# Altium PCB PCB3.PcbDoc
Units mm, origin at the board's own origin, x right, y up, seen from the top; angles counter-clockwise.
Board outline 60 x 50 mm, 2 copper layers (Top Layer, Bottom Layer); 63 components, 61 nets, 255 pads, 234 vias.
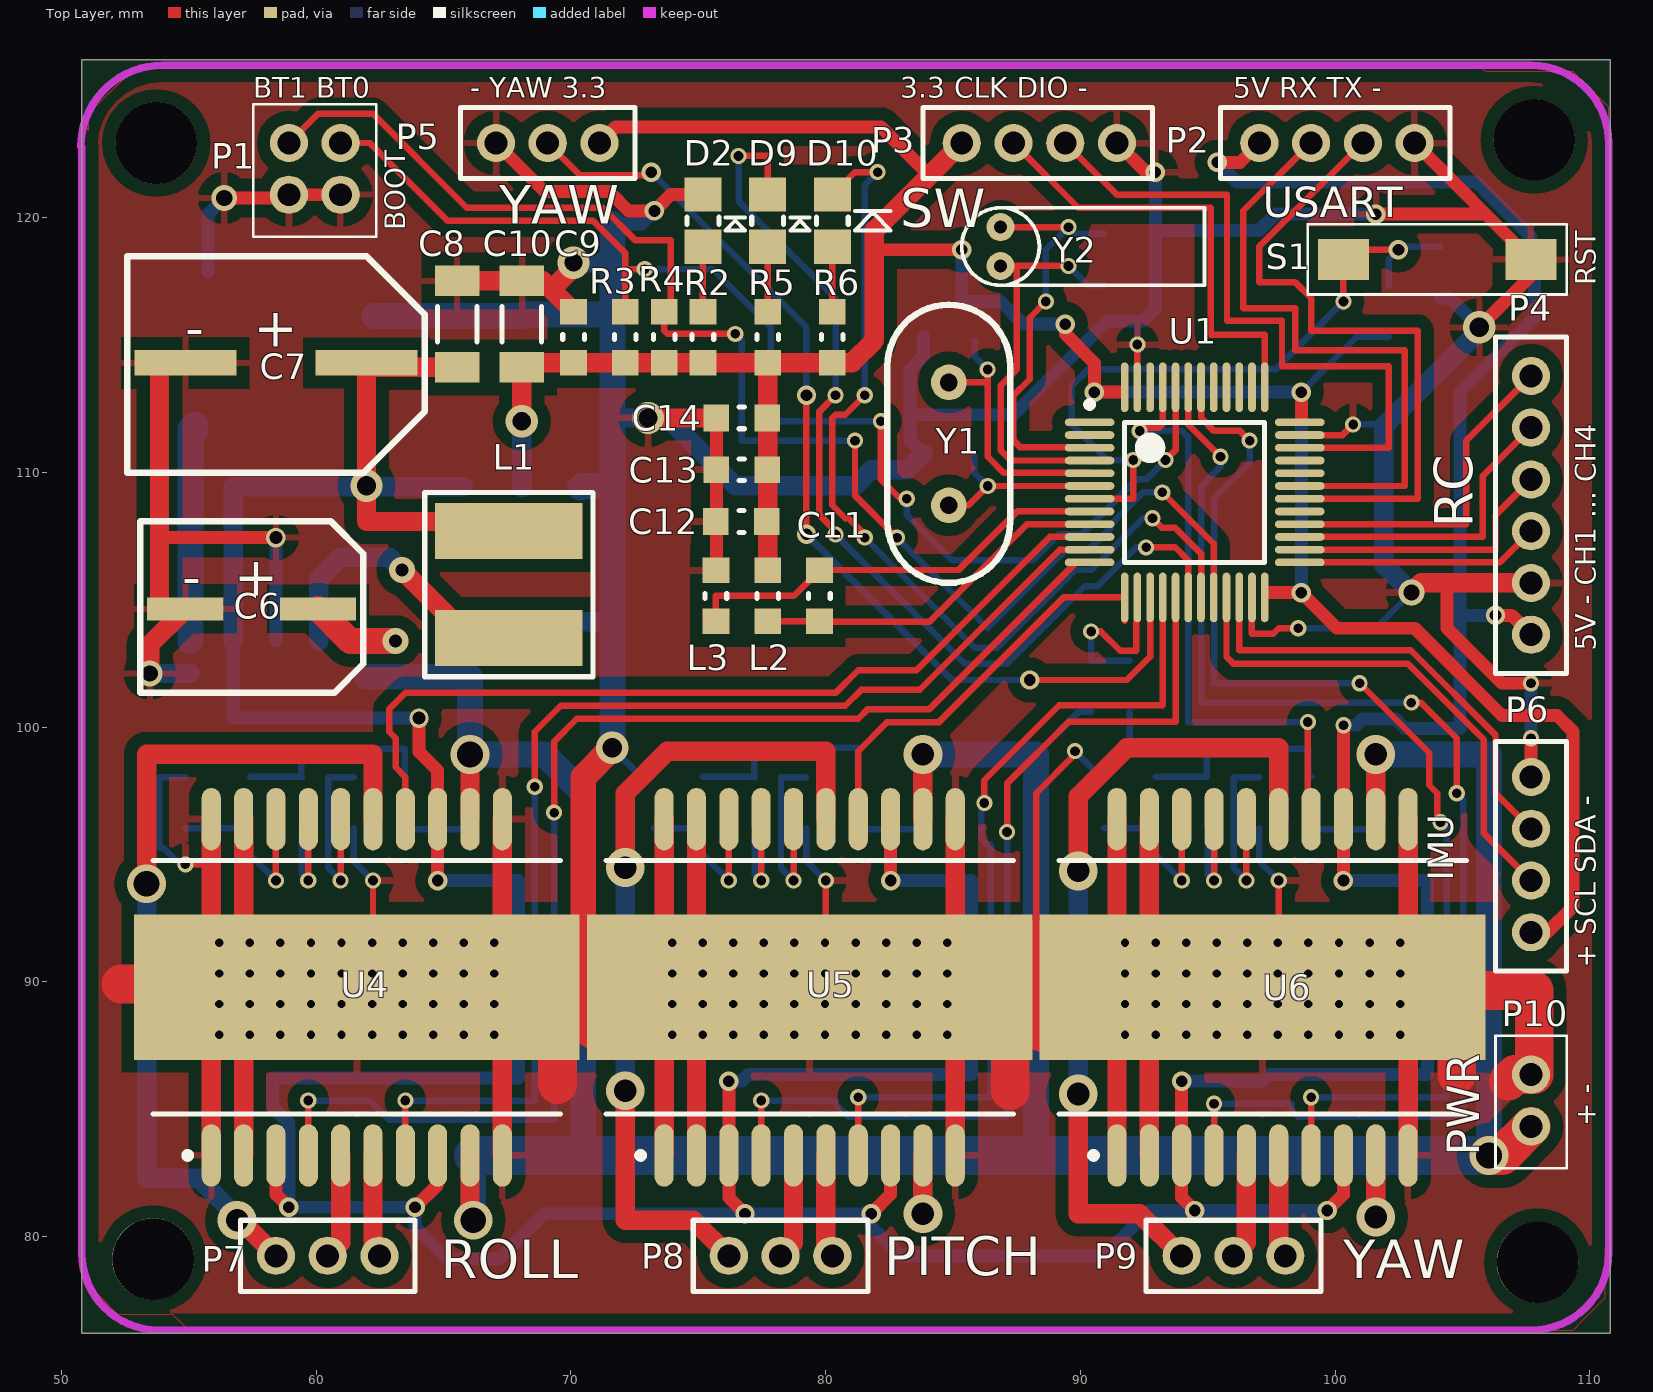
[diagram p0: Top Layer view]
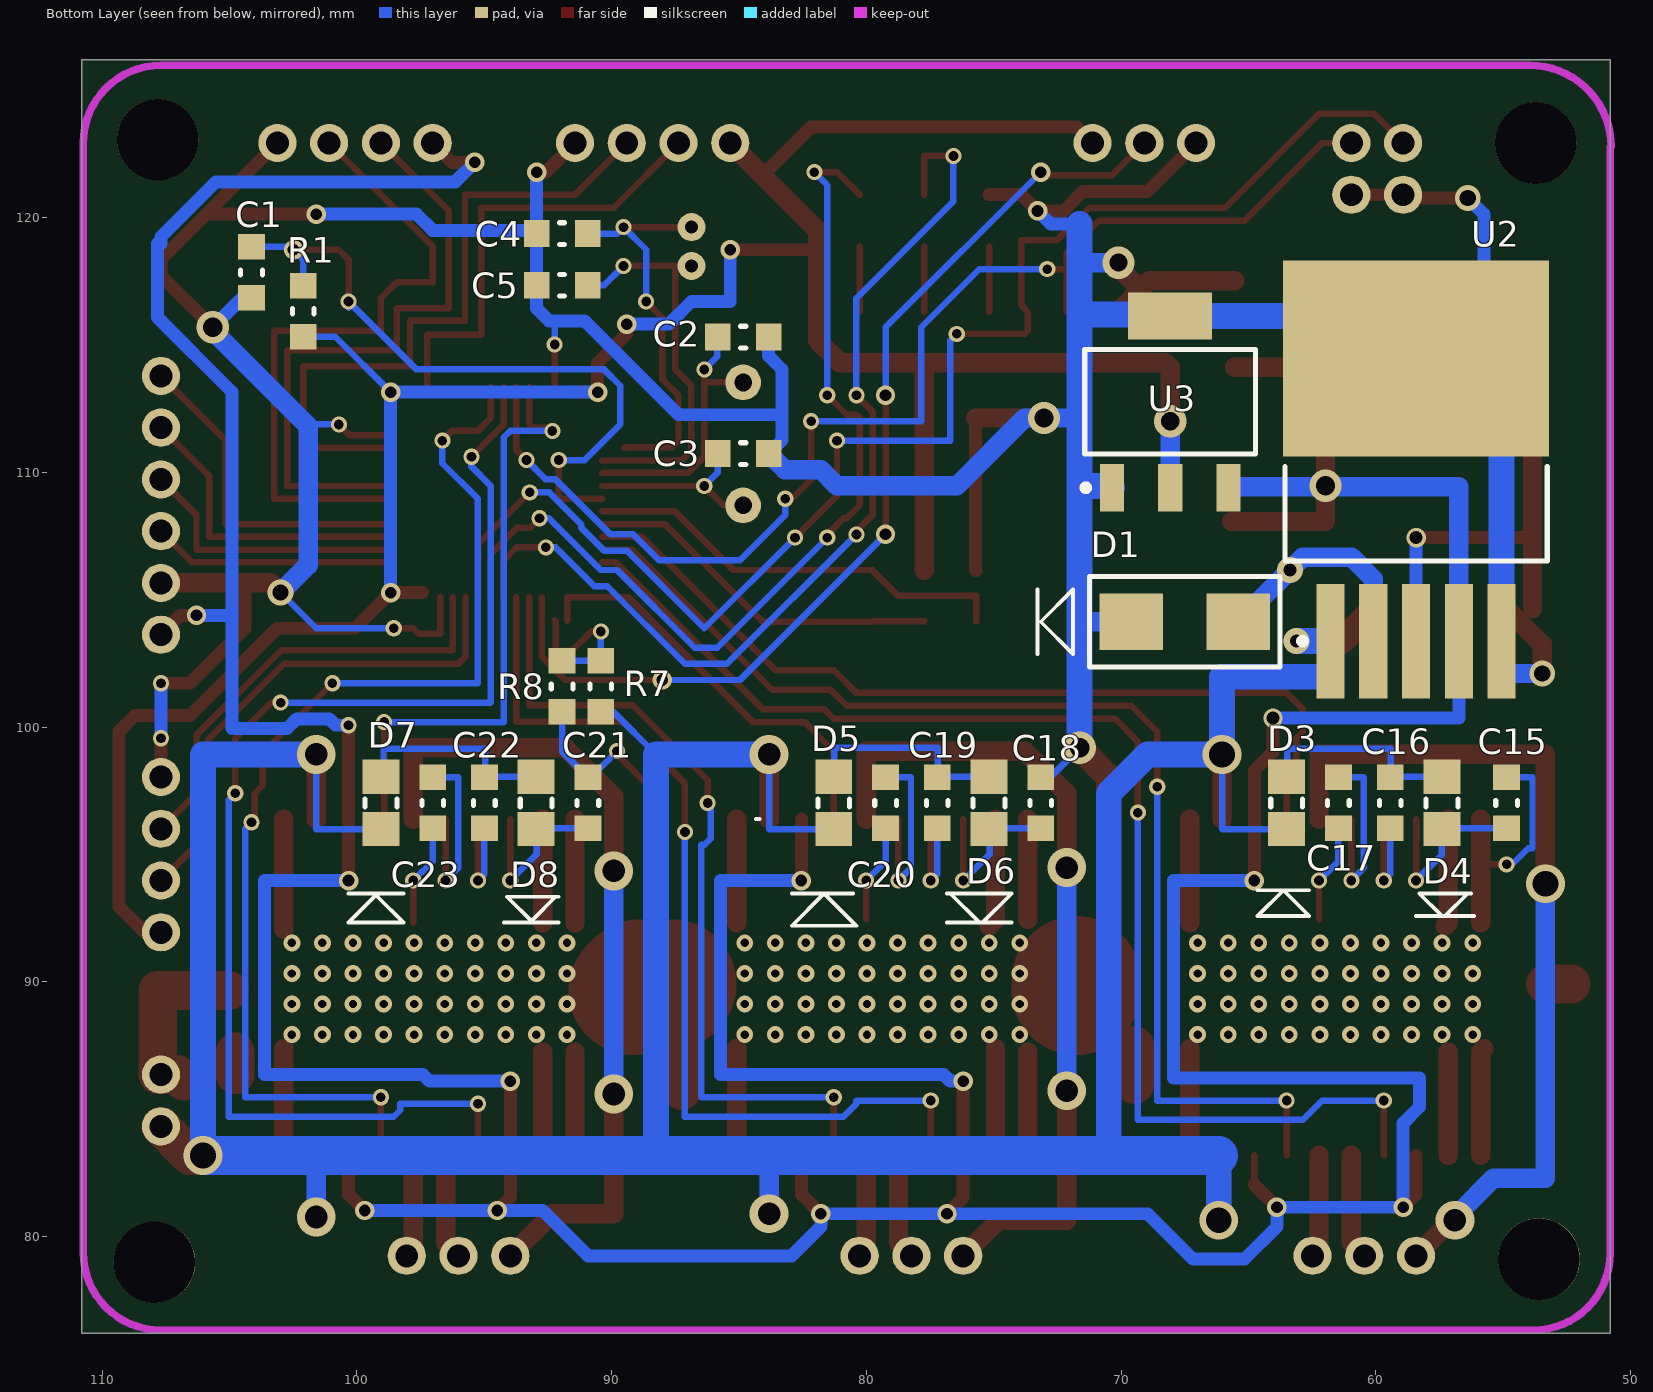
[diagram p1: Bottom Layer view, seen from below]

## Layer stack, top to bottom
Top Solder: solder mask 0.0102, Solder Resist, Dk 3.5
Top Layer: signal copper 0.0356
Dielectric1: dielectric 0.32, FR-4, Dk 4.8
Bottom Layer: signal copper 0.0356
Bottom Solder: solder mask 0.0102, Solder Resist, Dk 3.5

## Board outline
50.8,76.2 110.8,76.2 110.8,126.2 50.8,126.2

## Design rules (kind name [scope] priority, off if disabled: settings)
Clearance [All] p1: gap=0.178 ignorepadtopadclearanceinfootprint=FALSE except(0: Arc-Hole Track-Hole SMDPad-Hole THPad-Hole Via-Hole Fill-Hole Poly-Hole Region-Hole Text-Hole)
FabricationTestPointUsage TestPointUsage [All] p1: valid=0 allowmultiple=FALSE
FabricationTestpoint Testpoint [All] p1: side=3 testpointundercomponent=TRUE minsize=1.016 maxsize=2.54 preferedsize=1.524 minholesize=0 maxholesize=1.016 preferedholesize=0.813 testpointgrid=0.025 allowsidetop=TRUE allowsidebottom=TRUE usegrid=TRUE gridtolerance=0
HoleSize [All] p1: absolutevalues=TRUE maxlimit=25.4 minlimit=0.305 maxpercent=80.000 minpercent=20.000
PolygonConnect [All] p1: connectstyle=Relief reliefconductorwidth=0.254 reliefentries=4 polygonreliefangle="90 Angle" airgapwidth=0.254
RoutingVias [All] p1: holewidth=0.3 width=0.5 viastyle="Through Hole" minholewidth=0.711 minwidth=1.27 maxholewidth=0.711 maxwidth=1.27
SolderMaskExpansion [All] p1: expansion=0.102
Width [All] p1: maxlimit=25.4 minlimit=0.1 preferedwidth=0.2 minimp=50.000000 maximp=50.000000 favimp=50.000000
27 further rules are at their usual default settings.

## Components (designator, comment, footprint, x,y, rotation, side; value= is the part's Value field where it differs from the comment)
C1 "Cap" 0603 104.14,117.856 r90 bottom
C2 "Cap" 0603 84.836,115.316 r0 bottom
C3 "Cap" 0603 84.836,110.744 r180 bottom
C4 "Cap" 0603 91.948,119.38 r180 bottom
C5 "Cap" 0603 91.948,117.348 r0 bottom
C6 "Cap Pol1" "25V 100uF 6*7" 57.404,104.648 r270 top
C7 "Cap Pol1" "25V 330uF 8*10" 58.42,114.3 r270 top
C8 "Cap Pol1" 1206 65.532,115.824 r90 top
C9 "Cap" 0603 70.104,115.316 r270 top
C10 "Cap Pol1" 1206 68.072,115.824 r90 top
C11 "Cap" 0603 79.756,105.156 r270 top
C12 "Cap" 0603 76.692,108.077 r0 top
C13 "Cap" 0603 76.708,110.109 r0 top
C14 "Cap" 0603 76.708,112.141 r0 top
C15 "Cap" 0603 54.864,97.028 r270 bottom
C16 "Cap" 0603 59.436,97.028 r270 bottom
C17 "Cap" 0603 61.468,97.028 r90 bottom
C18 "Cap" 0603 73.152,97.028 r270 bottom
C19 "Cap" 0603 77.216,97.028 r270 bottom
C20 "Cap" 0603 79.248,97.028 r90 bottom
C21 "Cap" 0603 90.932,97.028 r270 bottom
C22 "Cap" 0603 94.996,97.028 r270 bottom
C23 "Cap" 0603 97.028,97.028 r90 bottom
D1 "Diode 1N4003" SMA 67.564,104.14 r180 bottom
D2 "D2" 0805 75.184,119.888 r90 top
D3 "Diode 1N914" 0805 63.5,97.028 r90 bottom
D4 "Diode 1N914" 0805 57.404,97.028 r270 bottom
D5 "Diode 1N914" 0805 81.28,97.028 r90 bottom
D6 "Diode 1N914" 0805 75.184,97.028 r270 bottom
D7 "Diode 1N914" 0805 99.06,97.028 r90 bottom
D8 "Diode 1N914" 0805 92.964,97.028 r270 bottom
D9 "D2" 0805 77.724,119.888 r90 top
D10 "D2" 0805 80.264,119.888 r90 top
L1 "Inductor" "330uH 5.8*5*4" 67.564,105.664 r180 top
L2 "Inductor" 0603 77.724,105.156 r270 top
L3 "Inductor" 0603 75.692,105.156 r270 top
P1 "BOOT" "2x2P 2mm" 58.928,120.904 r90 top
P2 "USART1" "4P 2mm" 97.028,122.936 r0 top
P3 "SW" "4P 2mm" 85.344,122.936 r0 top
P4 "RC" "6P 2mm" 107.696,103.632 r90 top
P5 "YAW_ANGLE" "3P 2mm" 71.12,122.936 r180 top
P6 "MPU6050" "4P 2mm" 107.696,91.948 r90 top
P7 "Roll" "3P 2mm" 62.484,79.248 r180 top
P8 "Pitch" "3P 2mm" 80.264,79.248 r180 top
P9 "Yaw" "3P 2mm" 98.044,79.248 r180 top
P10 "Power" "2P 2mm" 107.696,84.328 r90 top
R1 "Res2" 0603 102.108,116.332 r90 bottom
R2 "Res2" 0603 75.184,115.316 r270 top
R3 "Res2" 0603 72.136,115.316 r90 top
R4 "Res2" 0603 73.66,115.316 r90 top
R5 "Res2" 0603 77.724,115.316 r90 top
R6 "Res2" 0603 80.264,115.316 r90 top
R7 "Res2" 0603 90.424,101.6 r90 bottom
R8 "Res2" 0603 91.948,101.6 r270 bottom
S1 "SW-PB" SW3*6 107.696,118.364 r180 top
U1 "STM32F103C8T6" STM32F103C8T6 94.488,109.22 r0 top
U2 "LM2575S" LM2575S-TO-263-5 58.42,109.728 r90 bottom
U3 "AMS1117" AMS1117 68.072,112.776 r90 bottom
U4 "L6234D" L6234DD 61.595,89.789 r90 top
U5 "L6234D" L6234DD 79.375,89.789 r90 top
U6 "L6234D" L6234DD 97.155,89.789 r90 top
Y1 "8M" "XTAL 8M" 84.836,108.712 r90 top
Y2 "32.768K" "XTAL 32.768K" 86.868,118.872 r180 top

## Footprints (in the part's own frame and the unit in brackets; to place one, negate y for a bottom-side part, rotate by r counter-clockwise, add the part's x,y. Pads: shape width x height; smd on the part's side, far side on the other; paste and mask are expansions set on the pad)
"2P 2mm" [mm]
  round 1.5 hole 0.9: 1(0,0) 2(2.032,0)
  silkscreen extent -1.65,-1.4 3.56,1.4
"2x2P 2mm" [mm]
  round 1.5 hole 0.9: 1(0,0) 2(0,-2.032) 3(2.032,-2.032) 4(2.032,0)
  silkscreen extent -1.65,-3.43 3.56,1.4
"3P 2mm" [mm]
  round 1.5 hole 0.9: 1(0,0) 2(2.032,0) 3(4.064,0)
  silkscreen extent -1.4,-1.4 5.46,1.4
"4P 2mm" [mm]
  round 1.5 hole 0.9: 1(0,0) 2(2.032,0) 3(4.064,0) 4(6.096,0)
  silkscreen extent -1.52,-1.4 7.49,1.4
"6P 2mm" [mm]
  round 1.5 hole 0.9: 1(0,0) 2(2.032,0) 3(4.064,0) 4(6.096,0) 5(8.128,0) 6(10.16,0)
  silkscreen extent -1.52,-1.4 11.68,1.4
"25V 100uF 6*7" [mm]
  rect 0.9x3 smd: 1(0,2.667) 2(0,-2.54)
  silkscreen extent -3.43,-4.32 3.3,4.45
"25V 330uF 8*10" [mm]
  rect 1x4 smd: 1(0,3.556) 2(0,-3.556)
  silkscreen extent -4.19,-5.84 4.32,5.84
"330uH 5.8*5*4" [mm]
  rect 5.8x2.2 smd: 1(0,2.159) 2(0,-2.032)
  silkscreen extent -3.3,-3.56 3.3,3.68
0603 [mm] "Chip Resistor, 2-Leads, Body 1.6x0.8mm, IPC Low Density"
  rect 1x1.05 smd: 1(-1,0) 2(1,0)
  silkscreen extent -0.1,-0.43 0.1,0.43, body extent -0.8,-0.4 0.8,0.4, height 0.5
0805 [mm] "Chip Resistor, 2-Leads, Body 2.0x1.3mm, IPC Low Density"
  rect 1.35x1.45 smd: 1(-1.025,0) 2(1.025,0)
  silkscreen extent -0.15,-0.63 0.15,0.63, body extent -1,-0.64 1,0.64, height 1.25
1206 [mm] "Chip Resistor, 2-Leads, Body 3.2x1.6mm, IPC Low Density"
  rect 1.2x1.75 smd: 1(-1.7,0) 2(1.7,0)
  silkscreen extent -0.7,-0.77 0.7,0.77, body extent -1.6,-0.8 1.6,0.8, height 1.6
AMS1117 [mm] "SOT223, 4-Leads, Body 6.7x7.3mm (max), Pitch 2.29mm, IPC Low Density"
  rect 1.85x0.95 smd: 1(-3.375,2.29) 2(-3.375,0) 3(-3.375,-2.29)
  rect 1.85x3.3 smd: 4(3.375,0)
  silkscreen extent -3.5,-3.35 2.05,3.44, body extent -1.86,-3.35 1.86,3.35, height 1.8
L6234DD [mm] "SOIC, 20-Leads, Body 16.0x11.1mm (max), Pitch 1.27mm, IPC Low Density"
  oval 2.45x0.75 smd: 1(-6.6,5.715) 2(-6.6,4.445) 3(-6.6,3.175) 4(-6.6,1.905) 5(-6.6,0.635) 6(-6.6,-0.635) 7(-6.6,-1.905) 8(-6.6,-3.175) 9(-6.6,-4.445) 10(-6.6,-5.715) 11(6.6,-5.715) 12(6.6,-4.445) 13(6.6,-3.175) 14(6.6,-1.905) 15(6.6,-0.635) 16(6.6,0.635) 17(6.6,1.905) 18(6.6,3.175) 19(6.6,4.445) 20(6.6,5.715)
  rect 5.7x17.5 smd: 21(0,0)
  silkscreen extent -6.72,-8 4.98,8, body extent -5.55,-8 5.55,8, height 3.6
LM2575S-TO-263-5 [mm] "D2-PAK, 6-Pads, Body 9.7x10.3mm (max), IPC Low Density"
  rect 4.5x1.1 smd: 1(-6.35,3.36) 2(-6.35,1.68) 3(-6.35,0) 4(-6.35,-1.68) 5(-6.35,-3.36)
  rect 7.7x10.45 smd: 6(4.75,0)
  silkscreen extent -6.47,-5.15 0.5,5.15, body extent -3.2,-5.15 6.46,5.15, height 4.83
SMA [mm]
  rect 2.5x2.2 smd: 1(-2.032,0) 2(2.159,0)
  silkscreen extent -3.68,-1.78 3.81,1.78
STM32F103C8T6 [mm] "TSQFP, 48-Leads, Body 9.0x9.0mm (max), Pitch 0.50mm, IPC Low Density"
  oval 1.95x0.3 smd: 1(-4.125,2.75) 2(-4.125,2.25) 3(-4.125,1.75) 4(-4.125,1.25) 5(-4.125,0.75) 6(-4.125,0.25) 7(-4.125,-0.25) 8(-4.125,-0.75) 9(-4.125,-1.25) 10(-4.125,-1.75) 11(-4.125,-2.25) 12(-4.125,-2.75) 25(4.125,-2.75) 26(4.125,-2.25) 27(4.125,-1.75) 28(4.125,-1.25) 29(4.125,-0.75) 30(4.125,-0.25) 31(4.125,0.25) 32(4.125,0.75) 33(4.125,1.25) 34(4.125,1.75) 35(4.125,2.25) 36(4.125,2.75)
  oval 0.3x1.95 smd: 13(-2.75,-4.125) 14(-2.25,-4.125) 15(-1.75,-4.125) 16(-1.25,-4.125) 17(-0.75,-4.125) 18(-0.25,-4.125) 19(0.25,-4.125) 20(0.75,-4.125) 21(1.25,-4.125) 22(1.75,-4.125) 23(2.25,-4.125) 24(2.75,-4.125) 37(2.75,4.125) 38(2.25,4.125) 39(1.75,4.125) 40(1.25,4.125) 41(0.75,4.125) 42(0.25,4.125) 43(-0.25,4.125) 44(-0.75,4.125) 45(-1.25,4.125) 46(-1.75,4.125) 47(-2.25,4.125) 48(-2.75,4.125)
  silkscreen extent -4.25,-2.75 2.75,3.57, body extent -3.5,-3.5 3.5,3.5, height 1.6
SW3*6 [mm]
  rect 2x1.6 smd: 1(0,0) 2(7.366,0)
  silkscreen extent -1.4,-1.38 8.76,1.37
"XTAL 8M" [mm] "pin: 0.43,  pin2pin: 4.88, size: 11.05*4.7"
  round 1.4 hole 0.7: 1(0,0) 2(4.826,0)
  silkscreen extent -3.05,-2.41 7.87,2.41
"XTAL 32.768K" [mm] "3*8"
  round 1.1 hole 0.5: 1(0,0.762) 2(0,-0.762)
  silkscreen extent -8,-1.52 1.52,1.52

## Part data
C1 C2 C3 C4 C5 C9 C11 C12 C13 C14 C15 C16 C17 C18 C19 C20 C21 C22 C23: "Capacitor"
C6 C7 C8 C10: "Polarized Capacitor (Radial)"
D1: "1 Amp General Purpose Rectifier"
D2 D9 D10: library part LED3, "Typical BLUE SiC LED"
D3 D4 D5 D6 D7 D8: "High Conductance Fast Diode"
P1: library part "Header 2X2", "Header, 2-Pin, Dual row"
P2 P3: library part "Header 4H", "Header, 4-Pin, Right Angle"
P4: library part "Header 3X2", "Header, 3-Pin, Dual row"
P5 P7 P8 P9: library part "Header 3", "Header, 3-Pin"
P6: library part "Header 4", "Header, 4-Pin"
P10: library part "Header 2", "Header, 2-Pin"
R1 R2 R3 R4 R5 R6 R7 R8: "Resistor"
S1: "Switch"
Y1 Y2: library part XTAL, "Crystal Oscillator"

## Free pads (board coordinates)
  round 3.2 hole 3.2: 0(53.594,79.121) 1(107.95,78.994) 4(107.823,123.063) 5(53.721,122.936)

## Via types
v1: diameter 0.66, hole 0.33, Top Layer to Bottom Layer, tented top, 120 vias
v2: diameter 0.635, hole 0.381, Top Layer to Bottom Layer, 62 vias
v3: diameter 0.762, hole 0.457, Top Layer to Bottom Layer, 26 vias
v4: diameter 1.524, hole 0.889, Top Layer to Bottom Layer, 9 vias
v5: diameter 1.27, hole 0.762, Top Layer to Bottom Layer, 4 vias
v6: diameter 1.524, hole 1.016, Top Layer to Bottom Layer, 4 vias
v7: diameter 1.016, hole 0.635, Top Layer to Bottom Layer, 3 vias
v8: diameter 1.27, hole 0.711, Top Layer to Bottom Layer, 2 vias
v9: diameter 1.016, hole 0.508, Top Layer to Bottom Layer, 2 vias
v10: diameter 0.762, hole 0.508, Top Layer to Bottom Layer, 2 vias

## Nets (pads, with @x,y where several pads share a name; then routed paths per layer and width w, separated by ;. In a path a pad name is that pad's centre, name@x,y a point inside that pad or via, vN(x,y) a via of type N, cw(c..) or ccw(c..) an arc to the next point about the centre after c; other vN are vias at no path point)
3.3V: C9.2 C10.1 C12.2 C13.2 C14.2 L2.1 P3.1 P5.1 P6.1 R1.1 R2.2 R3.1 R4.1 R5.1 R6.1 U1.24 U1.36 U1.48 U3.2 | length 108.8
  Top Layer w0.508: P5.1 71.755,123.571 82.169,123.571 84.074,121.666 ; 81.915,118.745 v3(85.344,118.745) ; v3(89.408,115.824) 89.408,115.443 90.551,114.3 v3(90.551,113.157) 91.55,113.157 ; 97.426,105.283 v3(98.679,105.283) 100.076,103.886 103.124,103.886 106.553,100.457 108.712,100.457 109.347,99.822 109.347,92.964 108.331,91.948 P6.1 ; U1.36@98.679,112.074 v3(98.679,113.157)
  Top Layer w0.762: v8(68.072,112.014) C10.1 68.264,114.316 C9.2 R3.1 R4.1 R2.2 R5.1 ; L2.1 R5.1 ; P3.1 84.074,121.666 81.915,119.507 81.915,118.745 81.915,115.189 81.042,114.316 R6.1 R5.1
  Bottom Layer w0.254: v3(98.679,113.157) 100.854,115.332 R1.1
  Bottom Layer w0.508: v3(85.344,118.745) 85.344,116.713 86.868,116.713 87.757,115.824 v3@89.281,115.824 ; v3(90.551,113.157) v3(98.679,113.157) v3(98.679,105.283)
  Bottom Layer w0.762: U3.2 v8(68.072,112.014)
5V: C7.1 C8.1 L1.2 P2.1 P4.1 U2.4 U3.3 U4.3 U4.8 U4.13 U5.3 U5.8 U5.13 U6.3 U6.8 U6.13 | length 229.6
  Top Layer w0.254: U4.8@64.77,82.042 U4.8
  Top Layer w0.508: U4.3 58.42,81.661 v3(58.928,81.153) ; v3(63.881,81.153) U4.8@64.77,82.042 ; v10(64.037,100.359) 64.037,99.031 64.77,98.298 v3(64.77,93.98) ; v3(76.2,86.106) 76.2,81.534 v3@76.581,81.153 ; v3(81.788,80.899) 82.55,81.661 U5.8 ; v3(82.55,93.98) U5.13 ; v3(93.98,86.106) 93.98,81.534 v3(94.488,81.026) ; v3(95.377,122.174) 96.266,122.174 P2.1 ; v3(99.695,81.026) 100.33,81.661 U6.8 ; v3(100.33,93.98) v2(100.33,100.076) ; v3(106.299,104.394) 106.934,104.394 P4.1
  Top Layer w0.762: C7.1 61.976,108.077 L1.2@65.659,108.077 ; C7.1@62.152,114.124 C8.1
  Bottom Layer w0.508: U2.4 56.74,100.359 v10(64.037,100.359) ; v3(64.77,93.98) 67.945,93.98 67.945,86.233 58.293,86.233 58.293,85.09 58.928,84.455 v3(58.928,81.153) v3(63.881,81.153) 63.881,80.391 65.151,79.121 67.183,79.121 68.961,80.899 v3(81.788,80.899) 81.788,80.391 82.931,79.248 90.932,79.248 92.71,81.026 v3(99.695,81.026) ; v3(76.2,86.106) 76.708,86.106 76.962,86.36 85.725,86.36 85.725,93.98 v3(82.55,93.98) ; v3(93.98,86.106) 97.155,86.106 97.409,86.36 103.632,86.36 103.632,93.98 v3(100.33,93.98) ; v3(95.377,122.174) 96.139,121.412 105.537,121.412 107.696,119.253 107.696,118.999 107.823,118.999 107.823,116.078 104.902,113.157 104.902,99.949 102.743,99.949 102.362,100.33 101.092,100.33 100.838,100.076 v2(100.33,100.076) ; 104.902,104.394 v3(106.299,104.394)
  Bottom Layer w0.762: U2.4 56.74,109.445 U3.3@65.782,109.445
  other v3: 76.835,80.899
  other v5: 61.976,109.474
12V: C6.1 D3.1 D5.1 D7.1 P10.1 R7.1 U2.1 U4.9 U4.12 U5.9 U5.12 U6.9 U6.12 | length 154.5
  Top Layer w0.762: v6@66.04,80.772 U4.9 ; U4.12 v6(66.04,98.933) ; v4(83.82,80.899) U5.9 ; U5.12 v4(83.82,98.933) ; v4(101.6,80.772) U6.9 ; U6.12 v4(101.6,98.933)
  Top Layer w1.016: C6.1 61.341,103.378 v9(63.119,103.378) ; v6@66.04,80.772 v6(66.167,80.645)
  Top Layer w1.524: v6(106.045,83.185) 106.553,83.185 P10.1
  Bottom Layer w0.254: D3.1 66.031,96.003 v6@66.031,98.924 ; D5.1 83.811,96.003 83.811,98.924 v4(83.82,98.933) ; 88.265,98.933 89.932,100.6 R7.1 ; D7.1 101.591,96.003 101.591,98.924 v4(101.6,98.933)
  Bottom Layer w0.762: v4(83.82,80.899) 83.82,83.189 ; v4(101.6,80.772) 101.6,83.189
  Bottom Layer w1.016: U2.1 v9(63.119,103.378) ; U2.1@61.976,101.981 66.04,101.981 v6(66.04,98.933) 68.961,98.933 70.485,97.409 70.485,83.185 ; v6(66.167,80.645) 66.167,83.185 ; v4(83.82,98.933) 88.265,98.933 88.265,83.82 ; v4(101.6,98.933) 106.045,98.933 v6(106.045,83.185)
  Bottom Layer w1.524: 66.167,83.185 v6(106.045,83.185)
BOOT0: P1.3 R3.2 U1.44 | length 49.9
  Top Layer w0.254: P1.3 62.103,122.936 65.151,119.888 70.866,119.888 72.136,118.618 R3.2 ; 72.136,117.983 v2(72.898,117.983) ; v2(82.169,112.014) 82.169,109.728 82.931,108.966 v2(83.185,108.966) v2@83.185,109.093 ; v2(93.345,110.49) 93.738,110.883 U1.44
  Bottom Layer w0.254: v2(72.898,117.983) 75.565,117.983 77.851,115.697 77.851,112.014 v2(82.169,112.014) ; v2(83.185,108.966) 83.185,108.331 84.963,106.553 88.138,106.553 89.154,107.569 90.043,107.569 92.202,109.728 92.583,109.728 v2(93.345,110.49)
BOOT1: P1.4 R4.2 U1.20 | length 56.4
  Top Layer w0.254: P1.4 60.071,124.079 62.23,124.079 65.913,120.396 71.247,120.396 72.517,119.126 73.914,119.126 73.914,116.57 R4.2 73.66,115.57 73.787,115.443 v2(76.454,115.443) ; v2(81.153,111.252) 81.153,109.093 v2(82.804,107.442) ; v2(93.218,109.22) 95.238,107.2 U1.20
  Bottom Layer w0.254: v2(76.454,115.443) 76.708,115.189 76.708,111.252 v2(81.153,111.252) ; v2(82.804,107.442) 86.36,103.886 89.408,106.934 90.297,106.934 91.186,107.823 91.186,107.95 92.456,109.22 v2(93.218,109.22)
ERR_LED: D10.2 U1.19 | length 37.4
  Top Layer w0.254: D10.2 81.144,121.793 v2(82.042,121.793) ; v2(81.534,107.442) 81.534,107.569 80.899,108.204 80.772,108.204 80.264,108.712 80.264,112.141 80.391,112.268 80.772,112.268 v2(81.534,113.03) ; v2(92.837,108.204) 93.218,107.823 93.726,107.823 94.738,106.811 U1.19
  Bottom Layer w0.254: v2(81.534,107.442) 85.852,103.124 86.741,103.124 89.789,106.172 90.424,106.172 92.456,108.204 v2(92.837,108.204) ; v2(81.534,113.03) 81.534,121.285 v2(82.042,121.793)
GND: C1.1 C2.1 C3.2 C4.1 C5.2 C6.2 C7.2 C8.2 C9.1 C10.2 C12.1 C13.1 C14.1 C15.1 C17.1 C18.1 C20.1 C21.1 C23.1 D1.1 D2.2 L3.1 P1.1 P1.2 P2.4 P3.4 P4.2 P5.3 P6.4 P10.2 R8.2 S1.1 U1.23 U1.35 U1.47 U2.3 U2.5 U2.6 U3.1 U3.4 U4.1 U4.2 U4.10 U4.11 U4.19 U4.20 U4.21 U5.1 U5.2 U5.10 U5.11 U5.19 U5.20 U5.21 U6.1 U6.2 U6.10 U6.11 U6.19 U6.20 U6.21 | length 334.6
  Top Layer w0.254: v2(54.864,94.615) 55.626,94.615 ; U4.21@62.23,92.456 v2(62.23,93.98) ; 70.485,91.313 U5.21@71.755,90.043 ; U5.21@80.01,92.456 v2(80.01,93.98) ; 88.265,91.821 88.265,97.409 89.789,98.933 v2(89.789,99.06) ; U1.47 v2(92.238,115.026) ; U1.23 96.738,103.668 97.572,103.668 97.79,103.886 v2@98.298,103.886 ; U6.21@97.79,92.329 v2(97.79,93.98) ; U1.35 100.294,111.47 v2(100.711,111.887)
  Top Layer w0.508: 53.848,107.442 v10(58.42,107.442) ; v7(56.388,120.777) 58.801,120.777 P1.1 P1.2 ; P5.3 68.961,121.031 71.501,121.031 72.263,120.269 v3(73.279,120.269) ; v3@73.406,120.396 73.923,120.913 D2.2 ; L3.1 75.708,106.172 C13.1 C14.1 ; P3.4 92.583,121.793 v3(92.948,121.793) ; v3(101.6,120.142) 105.855,120.142 ; P2.4 S1.1 107.696,117.729 v5(105.664,115.697) ; 104.394,105.664 104.394,103.886 106.553,101.727 v2(107.696,101.727) ; P6.4 v2(107.696,99.568)
  Top Layer w0.762: v7(53.467,102.108) 53.467,103.251 C6.2 ; C6.2@53.848,104.648 53.848,107.442 C7.2@53.848,114.3 ; U4.21@55.753,87.376 55.88,87.249 U4.1 ; U4.21@55.88,92.329 U4.20 ; U4.2 U4.21@57.15,87.249 ; U4.19 57.15,92.329 U4.21@57.277,92.202 ; C8.2 C10.2 68.896,117.524 69.241,117.179 ; U4.10 U4.21@67.31,87.376 ; U4.21@67.31,92.329 U4.11 ; C9.1 69.241,117.179 ; v8(70.104,118.237) 70.104,118.042 69.241,117.179 ; v5(73.025,112.141) C14.1 ; U5.1 U5.21@73.66,87.249 ; U5.21@73.66,92.456 U5.20 ; U5.2 U5.21@74.93,87.376 ; U5.19 74.93,92.456 U5.21@75.184,92.202 ; U5.10 U5.21@85.09,87.376 ; U5.21@85.09,92.329 U5.11 ; U6.1 U6.21@91.44,87.249 ; U6.21@91.44,92.329 U6.20 ; U6.2 U6.21@92.71,87.249 ; U6.21@92.71,92.329 U6.19 ; U6.10 U6.21@102.87,87.376 ; U6.21@102.87,92.075 U6.11 ; v7(102.997,105.283) 103.378,105.664 104.394,105.664 P4.2
  Top Layer w1.016: 70.485,91.313 70.485,98.044 v5(71.628,99.187)
  Top Layer w1.524: 52.337,89.916 U4.21@53.34,89.916 ; 69.469,85.979 U4.21@69.469,87.503 ; 87.249,85.725 U5.21@87.249,87.376 ; 104.775,86.36 U6.21@104.775,87.249 ; U6.21@105.029,89.662 107.823,89.662 P10.2@107.823,86.36 ; 106.807,86.106 107.061,86.36 P10.2
  Top Layer w5.08: U5.21@71.755,89.662 U5.21@71.755,90.043 ; U5.21@87.63,89.916 88.9,89.916 U6.21@89.154,89.662
  Bottom Layer w0.254: v2@54.647,94.615 54.012,95.25 53.848,95.25 53.848,98.028 C15.1 ; C17.1 61.468,94.742 v2(62.23,93.98) ; v5(71.628,99.187) 72.787,98.028 C18.1 ; C20.1 79.248,94.742 v2(80.01,93.98) ; v2(89.789,99.06) 90.821,98.028 C21.1 91.948,99.044 R8.2 ; v2(92.238,115.026) 92.238,115.915 ; C23.1 97.028,94.742 v2(97.79,93.98) ; v2(98.552,103.886) 101.6,103.886 v7(102.997,105.283) ; v2(100.711,111.887) 101.854,111.887
  Bottom Layer w0.508: U2.6@55.753,117.856 55.753,120.142 v7(56.388,120.777) ; U2.3 v10(58.42,107.442) ; 71.628,119.761 72.771,119.761 v3(73.279,120.269) ; C3.2 83.312,111.268 83.312,112.268 ; C2.1 83.836,114.57 83.312,114.046 83.312,112.268 ; v3(92.948,121.793) C4.1@92.948,119.507 ; v3(101.6,120.142) 97.663,120.142 97.028,119.507 C4.1@92.948,119.507 ; C1.1 104.505,116.856 v5(105.664,115.697) ; v2(107.696,99.568) v2(107.696,101.727) ; 83.312,112.268 87.376,112.268 91.059,115.951 92.456,115.951 92.948,116.443 C5.2 C4.1 C4.1@92.948,119.507
  Bottom Layer w0.762: v7(53.467,102.108) U2.5@55.06,102.108 ; D1.1 71.628,104.14 ; v8@70.358,118.237 71.628,118.237 ; 71.882,112.141 v5(73.025,112.141) 73.787,112.141 76.454,109.474 81.153,109.474 81.788,110.109 83.201,110.109 C3.2 ; v7@102.87,105.283 v7(102.997,105.283) 101.917,106.362 101.917,111.823 105.664,115.57 v5(105.664,115.697)
  Bottom Layer w1.016: U2.5 U2.6@55.06,111.448 ; U2.6@55.245,111.633 U2.6@55.06,111.448 ; U2.6@55.245,111.887 55.06,111.702 U2.6@55.06,111.448 ; U2.6@62.284,116.151 U3.4 68.126,116.205 71.628,116.205 ; U3.1 70.435,109.474 71.628,109.474 ; v5(71.628,99.187) 71.628,104.14 71.628,109.474 ; 71.628,119.761 71.628,118.237 71.628,116.205 ; 71.628,109.474 71.628,116.205
  other v1: 56.195,87.932 57.395,87.932 58.595,87.932 59.795,87.932 60.995,87.932 62.195,87.932 63.395,87.932 64.595,87.932 65.795,87.932 66.995,87.932 73.975,87.932 75.175,87.932 76.375,87.932 77.575,87.932 78.775,87.932 79.975,87.932 81.175,87.932 82.375,87.932 83.575,87.932 84.775,87.932 91.755,87.932 92.955,87.932 94.155,87.932 95.355,87.932 96.555,87.932 97.755,87.932 98.955,87.932 100.155,87.932 101.355,87.932 102.555,87.932 56.195,89.132 57.395,89.132 58.595,89.132 59.795,89.132 60.995,89.132 62.195,89.132 63.395,89.132 64.595,89.132 65.795,89.132 66.995,89.132 73.975,89.132 75.175,89.132 76.375,89.132 77.575,89.132 78.775,89.132 79.975,89.132 81.175,89.132 82.375,89.132 83.575,89.132 84.775,89.132 91.755,89.132 92.955,89.132 94.155,89.132 95.355,89.132 96.555,89.132 97.755,89.132 98.955,89.132 100.155,89.132 101.355,89.132 102.555,89.132 56.195,90.332 57.395,90.332 58.595,90.332 59.795,90.332 60.995,90.332 62.195,90.332 63.395,90.332 64.595,90.332 65.795,90.332 66.995,90.332 73.975,90.332 75.175,90.332 76.375,90.332 77.575,90.332 78.775,90.332 79.975,90.332 81.175,90.332 82.375,90.332 83.575,90.332 84.775,90.332 91.755,90.332 92.955,90.332 94.155,90.332 95.355,90.332 96.555,90.332 97.755,90.332 98.955,90.332 100.155,90.332 101.355,90.332 102.555,90.332 56.195,91.532 57.395,91.532 58.595,91.532 59.795,91.532 60.995,91.532 62.195,91.532 63.395,91.532 64.595,91.532 65.795,91.532 66.995,91.532 73.975,91.532 75.175,91.532 76.375,91.532 77.575,91.532 78.775,91.532 79.975,91.532 81.175,91.532 82.375,91.532 83.575,91.532 84.775,91.532 91.755,91.532 92.955,91.532 94.155,91.532 95.355,91.532 96.555,91.532 97.755,91.532 98.955,91.532 100.155,91.532 101.355,91.532 102.555,91.532
NetC15_2: C15.2 D4.2 U4.18 | length 7.4
  Top Layer w0.254: v2(58.42,93.98) U4.18
  Bottom Layer w0.254: C15.2 57.379,96.028 D4.2 57.404,94.996 v2(58.42,93.98)
NetC16_1: C16.1 D3.2 D4.1 | length 8.3
  Bottom Layer w0.254: D4.1 C16.1@59.411,98.053 ; C16.1 C16.1@59.411,98.053 ; D3.2 63.475,98.078 63.475,99.162 59.411,99.162 C16.1@59.411,98.053
NetC16_2: C16.2 U4.17 | length 4.6
  Top Layer w0.254: v2(59.69,93.98) U4.17
  Bottom Layer w0.254: C16.2 59.436,94.234 v2(59.69,93.98)
NetC17_2: C17.2 U4.16 | length 7.7
  Top Layer w0.254: v2(60.96,93.98) U4.16
  Bottom Layer w0.254: v2(60.96,93.98) 60.468,94.472 60.468,98.028 C17.2
NetC18_2: C18.2 D6.2 U5.18 | length 6.8
  Top Layer w0.254: v2(76.2,93.98) U5.18
  Bottom Layer w0.254: C18.2@73.279,96.028 D6.2@75.159,96.028 ; D6.2 D6.2@75.159,96.028 ; v2(76.2,93.98) 75.159,95.021 D6.2@75.159,96.028
NetC19_1: C19.1 D5.2 D6.1 | length 8.3
  Bottom Layer w0.254: D6.1 C19.1@77.191,98.053 ; C19.1 C19.1@77.191,98.053 ; D5.2@81.255,98.078 81.255,99.187 77.191,99.187 C19.1@77.191,98.053
NetC19_2: C19.2 U5.17 | length 4.6
  Top Layer w0.254: v2(77.47,93.98) U5.17
  Bottom Layer w0.254: C19.2 77.216,94.234 v2(77.47,93.98)
NetC20_2: C20.2 U5.16 | length 7.7
  Top Layer w0.254: v2(78.74,93.98) U5.16
  Bottom Layer w0.254: v2(78.74,93.98) 78.248,94.472 78.248,98.028 C20.2
NetC21_2: C21.2 D8.2 U6.18 | length 6.9
  Top Layer w0.254: v2(93.98,93.98) U6.18
  Bottom Layer w0.254: C21.2 D8.2@92.939,96.028 ; D8.2 D8.2@92.939,96.028 ; v2(93.98,93.98) 92.939,95.021 D8.2@92.939,96.028
NetC22_1: C22.1 D7.2 D8.1 | length 8.3
  Bottom Layer w0.254: D8.1@92.964,98.046 92.957,98.053 94.971,98.053 94.971,99.162 98.958,99.162 98.958,98.155 D7.2
NetC22_2: C22.2 U6.17 | length 4.6
  Top Layer w0.254: v2(95.25,93.98) U6.17
  Bottom Layer w0.254: C22.2 94.996,94.234 v2(95.25,93.98)
NetC23_2: C23.2 U6.16 | length 7.7
  Top Layer w0.254: v2(96.52,93.98) U6.16
  Bottom Layer w0.254: v2(96.52,93.98) 96.028,94.472 96.028,98.028 C23.2
NetD1_2: D1.2 L1.1 U2.2 | length 12.9
  Top Layer w0.762: v9(63.373,106.172) L1.1@66.04,103.505
  Bottom Layer w0.762: U2.2 60.1,105.82 60.96,106.68 62.865,106.68 D1.2
NetD2_1: D2.1 R2.1 | length 2.5
  Top Layer w0.254: R2.1 D2.1
NetD9_1: D9.1 R5.2 | length 2.5
  Top Layer w0.254: R5.2 D9.1
NetD10_1: D10.1 R6.2 | length 2.5
  Top Layer w0.254: R6.2 D10.1
NRST: C1.2 R1.2 S1.2 U1.7 | length 27.4
  Top Layer w0.254: U1.7 92.075,108.97 v2(92.075,110.49) ; v2(100.33,116.713) S1.2 100.711,118.745 v3(102.489,118.745)
  Bottom Layer w0.254: v2(92.075,110.49) 91.059,110.49 89.662,111.887 89.662,113.411 90.297,114.046 97.663,114.046 v2(100.33,116.713) ; v2@100.33,116.459 v2@100.33,116.84 ; R1.2 102.108,118.364 102.6,118.856 C1.2
OSC32_IN: C4.2 U1.3 Y2.2 | length 15.7
  Top Layer w0.254: Y2.2 v2(89.535,119.634) ; v2(88.646,116.713) 88.011,116.078 88.011,113.665 87.376,113.03 87.376,111.252 87.63,110.998 89.469,110.998 U1.3@89.497,110.97
  Bottom Layer w0.254: v2(88.646,116.713) 88.646,118.745 v2(89.535,119.634) 89.789,119.38 C4.2
OSC32_OUT: C5.1 U1.4 Y2.1 | length 15.6
  Top Layer w0.254: Y2.1 v2(89.535,118.11) ; 87.503,118.11 87.503,114.046 86.868,113.411 86.868,110.871 87.249,110.49 87.376,110.49 U1.4
  Bottom Layer w0.254: v2(89.535,118.11) 90.297,117.348 C5.1
OSC_IN: C2.2 U1.5 Y1.2 | length 10.6
  Top Layer w0.254: Y1.2 86.36,113.538 ; v2(86.36,114.046) 86.36,110.617 86.995,109.982 90.351,109.982 U1.5
  Bottom Layer w0.254: C2.2@85.852,115.189 85.852,114.554 v2(86.36,114.046)
OSC_OUT: C3.1 U1.6 Y1.1 | length 7.3
  Top Layer w0.254: Y1.1 85.606,108.712 v2(86.364,109.47) U1.6
  Bottom Layer w0.254: C3.1 85.836,109.998 v2(86.364,109.47)
PITCH_A: P8.1 U5.6 | length 4
  Top Layer w0.762: U5.6 80.01,79.502 P8.1
PITCH_B: P8.2 U5.5 | length 4.2
  Top Layer w0.762: P8.2 78.74,79.756 U5.5
PITCH_C: P8.3 U5.15 | length 32.6
  Top Layer w0.762: v4(72.136,85.725) 72.136,80.645 74.803,80.645 P8.3 ; v4(72.136,94.488) 72.136,97.409 73.787,99.06 80.01,99.06 U5.15
  Bottom Layer w0.762: v4(72.136,85.725) v4(72.136,94.488)
PWM1_1: U1.10 U4.14 | length 34.9
  Top Layer w0.254: U4.14 63.5,98.044 63.119,98.425 63.119,99.568 62.865,99.822 62.865,100.711 63.5,101.346 80.391,101.346 81.28,102.235 83.566,102.235 88.801,107.47 U1.10
PWM1_2: U1.11 U4.7 | length 46.3
  Top Layer w0.254: U4.7 v2(63.5,85.344) ; v2(68.58,97.663) 68.58,99.822 69.596,100.838 80.772,100.838 81.407,101.473 83.693,101.473 89.19,106.97 U1.11
  Bottom Layer w0.254: v2(63.5,85.344) 68.58,85.344 v2@68.58,97.536
PWM1_3: U1.12 U4.4 | length 50.9
  Top Layer w0.254: U4.4 v2(59.69,85.344) ; v2(69.342,96.647) 69.342,99.441 70.231,100.33 81.28,100.33 81.661,100.711 84.074,100.711 89.833,106.47 U1.12
  Bottom Layer w0.254: v2(59.69,85.344) 62.103,85.344 62.865,84.582 69.342,84.582 v2(69.342,96.647)
PWM2_1: U1.13 U5.14 | length 16.5
  Top Layer w0.254: U5.14 81.28,99.06 82.423,100.203 84.455,100.203 89.342,105.09 89.342,105.095 U1.13 U1.13@91.738,104.184
PWM2_2: U1.16 U5.7 | length 32.7
  Top Layer w0.254: U5.7 v2(81.28,85.471) ; v2(86.233,97.028) 86.233,97.917 89.174,100.858 93.238,100.858 U1.16
  Bottom Layer w0.254: v2(81.28,85.471) 86.487,85.471 86.487,95.377 86.36,95.377 86.106,95.631 86.106,96.901 v2(86.233,97.028)
PWM2_3: U1.17 U5.4 | length 37.6
  Top Layer w0.254: U5.4 v2@77.47,85.217 ; v2(87.122,95.885) 87.122,97.79 89.547,100.215 93.738,100.215 U1.17
  Bottom Layer w0.254: v2(77.47,85.344) 80.391,85.344 80.391,85.217 80.899,84.709 87.122,84.709 v2(87.122,95.885)
PWM3_1: U1.42 U6.7 | length 44.6
  Top Layer w0.254: U1.42 94.738,112.399 94.742,112.395 94.742,112.141 95.25,111.633 96.266,111.633 v2(96.647,111.252) ; U6.7 v2(99.06,85.471) ; v2(100.965,101.727) 103.695,98.996 103.695,97.727 104.013,97.409 104.013,96.393 v2(104.14,96.266)
  Bottom Layer w0.254: v2(96.647,111.252) 96.647,110.363 95.25,108.966 95.25,101.727 v2(100.965,101.727) ; v2(99.06,85.471) 104.394,85.471 104.394,96.012 v2(104.14,96.266)
PWM3_2: U1.43 U6.4 | length 51
  Top Layer w0.254: U1.43 94.238,111.883 v2(95.504,110.617) ; U6.4 v2(95.25,85.217) ; v2(102.997,100.965) 103.378,100.965 104.775,99.568 v2(104.775,97.409)
  Bottom Layer w0.254: v2(95.25,85.217) 98.298,85.217 98.298,84.963 98.552,84.709 105.029,84.709 105.029,97.155 v2(104.775,97.409) ; v2(95.504,110.617) 95.504,110.236 94.742,109.474 94.742,100.965 v2(102.997,100.965)
PWM3_3: U1.45 U6.14 | length 24.2
  Top Layer w0.254: v2(92.329,111.633) 92.456,111.76 93.091,111.76 93.238,111.907 U1.45 ; v2(98.933,100.203) 98.933,96.516 U6.14
  Bottom Layer w0.254: v2(92.329,111.633) 93.98,111.633 94.234,111.379 94.234,100.203 v2(98.933,100.203)
PWR_SENS: R7.2 R8.1 U1.14 | length 6
  Top Layer w0.254: v2(90.424,103.759) 90.805,103.759 91.567,102.997 92.202,102.997 92.202,104.159 U1.14@92.238,104.195
  Bottom Layer w0.254: v2(90.424,103.759) R7.2 R8.1
RC_CH1: P4.3 U1.25 | length 9.6
  Top Layer w0.254: U1.25 106.47,106.47 P4.3
RC_CH2: P4.4 U1.26 | length 11
  Top Layer w0.254: U1.26 106.299,106.97 106.299,108.331 P4.4
RC_CH3: P4.5 U1.27 | length 12.3
  Top Layer w0.254: U1.27 105.791,107.47 105.791,109.855 P4.5
RC_CH4: P4.6 U1.28 | length 13.4
  Top Layer w0.254: U1.28 105.156,107.97 105.156,111.252 P4.6
ROLL_A: P7.1 U4.6 | length 4
  Top Layer w0.762: U4.6 62.23,79.502 P7.1
ROLL_B: P7.2 U4.5 | length 4.2
  Top Layer w0.762: P7.2 60.96,79.756 U4.5
ROLL_C: P7.3 U4.15 | length 34.1
  Top Layer w0.762: v6(53.34,93.853) 53.34,98.933 62.23,98.933 U4.15 ; v4(56.896,80.645) 57.023,80.645 P7.3
  Bottom Layer w0.762: v6(53.34,93.853) 53.34,82.296 55.372,82.296 v4@56.706,80.962
RX: P2.2 U1.31 | length 25
  Top Layer w0.254: U1.31 102.739,109.47 102.739,114.804 98.429,114.804 98.429,116.455 96.397,116.455 96.397,120.273 P2.2
SCL: P6.2 U1.21 | length 20.1
  Top Layer w0.254: U1.21 95.738,102.763 96.012,102.489 102.863,102.489 105.845,99.507 105.845,95.831 P6.2
SDA: P6.3 U1.22 | length 17.8
  Top Layer w0.254: U1.22 96.238,103.025 102.969,103.025 106.299,99.695 106.299,97.409 P6.3
SWCLK: P3.2 U1.37 | length 18
  Top Layer w0.254: P3.2 89.916,120.396 95.123,120.396 95.123,115.399 97.238,115.399 U1.37
SWDIO: P3.3 U1.34 | length 27
  Top Layer w0.254: P3.3 91.44,120.904 95.758,120.904 95.758,115.951 97.917,115.951 97.917,114.173 102.108,114.173 102.108,110.97 U1.34
SYS_LED: D9.2 U1.18 | length 39.1
  Top Layer w0.254: v2(76.581,122.428) 77.724,122.428 D9.2 ; v2(80.391,107.569) 80.391,107.696 79.756,108.331 79.756,112.395 v2(80.391,113.03) ; v2(92.583,107.061) 93.726,107.061 94.238,106.549 U1.18
  Bottom Layer w0.254: v2(76.581,122.428) 76.581,120.65 80.391,116.84 v2(80.391,113.03) ; v2(80.391,107.569) 85.471,102.489 87.122,102.489 90.17,105.537 90.678,105.537 92.202,107.061 v2(92.583,107.061)
TX: P2.3 U1.30 | length 26.1
  Top Layer w0.254: U1.30 103.247,108.97 103.247,115.566 99.064,115.566 99.064,116.836 98.425,117.475 97.028,117.475 97.028,118.872 P2.3
VDDA: C11.2 L2.2 U1.9 | length 14.2
  Top Layer w0.254: L2.2 C11.2 ; C11.2@79.772,104.14 84.074,104.14 87.904,107.97 U1.9
VSSA: C11.1 L3.2 U1.8 | length 17
  Top Layer w0.254: L3.2 75.692,105.156 78.756,105.156 C11.1 ; C11.1@79.772,106.172 85.217,106.172 87.515,108.47 U1.8
YAW_A: P9.1 U6.6 | length 4
  Top Layer w0.762: U6.6 97.79,79.502 P9.1
YAW_B: P9.2 U6.5 | length 4.2
  Top Layer w0.762: P9.2 96.52,79.756 U6.5
YAW_C: P9.3 U6.15 | length 32.6
  Top Layer w0.762: v4(89.916,85.598) 89.916,80.899 92.329,80.899 P9.3 ; v4(89.916,94.361) 89.916,97.282 91.821,99.187 97.79,99.187 U6.15
  Bottom Layer w0.762: v4(89.916,85.598) v4(89.916,94.361)
YAW_SENS: P5.2 U1.15 | length 40
  Top Layer w0.254: P5.2 70.358,121.666 73.025,121.666 v3(73.152,121.793) ; v3(79.248,107.569) v3(79.248,113.03) ; v3(88.011,101.854) 91.821,101.854 92.738,102.771 U1.15
  Bottom Layer w0.254: v3(73.152,121.793) 79.248,115.697 v3(79.248,113.03) ; v3(79.248,107.569) 84.963,101.854 v3(88.011,101.854)
pads on no net: U1.1 U1.2 U1.29 U1.32 U1.33 U1.38 U1.39 U1.40 U1.41 U1.46

## Polygon pours and split planes (outlines as drawn)
no net on Top Layer "Bottom Overlay-No Net" (solid, pour order 4): 50.927,123.825 50.8,123.698 50.8,78.994 50.8,78.359 51.435,77.724 52.197,76.962 53.213,76.962 54.356,76.962 54.737,76.581 54.991,76.327 107.95,76.327 109.347,76.327 109.728,76.708 110.617,77.597 110.617,78.105 110.617,79.502 110.744,79.629 110.744,122.936 110.744,124.333 110.363,124.714 109.347,125.73 109.093,125.73 105.918,125.73 105.664,125.984 105.537,125.857 53.721,125.857 52.832,125.857 52.324,125.349 51.308,124.333 51.181,124.333 51.181,124.206 51.054,124.079 51.054,123.952 50.927,123.825 51.054,123.698 51.054,123.571 51.054,123.444
GND on Top Layer "Bottom Overlay-No Net" (solid, pour order 2): 108.204,76.454 109.093,76.454 109.855,77.216 109.982,77.216 109.982,77.851 110.617,78.486 110.617,78.359 110.617,78.994 110.744,79.121 110.744,79.375 110.744,123.444 110.617,123.571 110.617,124.079 109.855,124.841 109.855,124.968 109.093,125.73 108.458,125.73 108.204,125.984 53.213,125.984 52.705,125.984 51.689,124.968 51.689,124.46 51.308,124.079 51.054,123.825 51.054,78.74 51.054,78.359 51.435,77.978 51.435,77.851 52.197,77.089 52.959,77.089 53.213,76.835 54.483,76.835 54.737,76.581 55.753,76.581

## Keep-outs
Keep-Out Layer:
  lines w0.3: 50.761,122.792 cw(c53.953,122.792) 53.953,125.984 107.696,125.984 cw(c107.696,122.936) 110.744,122.936 110.744,79.375 cw(c107.696,79.375) 107.696,76.327 53.822,76.327 cw(c53.822,79.349) 50.8,79.349 50.8,122.792

## Silkscreen, mask and mechanical layers (free items; w line width, h text height)
Top Overlay:
  lines w0.15: 76.073,120.015 76.835,120.015 ; 78.613,120.015 79.375,120.015 ; 81.153,120.269 82.55,120.269 ; 76.073,119.507 76.454,119.888 76.835,119.507 76.073,119.507 ; 78.613,119.507 79.375,119.507 78.994,119.888 78.613,119.507 ; 81.153,119.507 82.55,119.507 81.915,120.142 81.788,120.142 81.153,119.507
  text "BT1 BT0" at 57.531,124.714 h0.8
  text "- YAW 3.3" at 66.04,124.714 h0.8
  text "3.3 CLK DIO -" at 82.931,124.714 h0.8
  text "5V RX TX -" at 96.012,124.714 h0.8
  text "USART" at 97.155,120.015 h1.2
  text "YAW" at 67.183,119.761 h1.5
  text "SW" at 82.931,119.634 h1.5
  text "BOOT" at 63.5,119.507 h0.8 r90
  text "RST" at 110.236,117.348 h0.8 r90
  text "-   +" at 54.864,114.935 h1.5
  text "RC" at 105.41,107.823 h1.5 r90
  text "-  +" at 54.737,105.156 h1.5
  text "5V - CH1 ... CH4" at 110.236,102.997 h0.8 r90
  text "IMU" at 104.648,93.98 h1 r90
  text "+ SCL SDA -" at 110.236,90.551 h0.8 r90
  text "+ -" at 110.236,84.328 h0.8 r90
  text "PWR" at 105.664,83.185 h1.27 r90
  text "PITCH" at 82.296,78.486 h1.52
  text "ROLL" at 64.897,78.359 h1.52
  text "YAW" at 100.33,78.359 h1.52
Bottom Overlay:
  lines w0.15: 56.134,92.583 58.42,92.583 ; 62.611,93.599 64.643,93.599 ; 73.279,102.87 73.279,105.41 ; 74.295,92.329 76.835,92.329 ; 80.518,93.472 82.931,93.472 ; 84.201,96.393 84.328,96.393 ; 92.075,92.329 94.234,92.329 ; 92.075,93.345 94.107,93.345 93.091,92.329 93.091,92.456 92.202,93.345 ; 98.171,93.472 100.33,93.472 ; 56.261,93.472 56.388,93.472 57.277,92.583 57.404,92.583 58.293,93.472 56.261,93.472 ; 62.611,92.583 64.643,92.583 63.627,93.599 62.611,92.583 ; 71.882,102.87 71.882,105.41 73.152,104.14 71.882,102.87 ; 74.295,93.472 76.835,93.472 76.708,93.472 75.565,92.329 75.438,92.329 74.295,93.472 ; 80.391,92.202 82.931,92.202 81.661,93.472 80.391,92.202 ; 98.171,92.329 100.33,92.329 99.187,93.472 99.187,93.345 98.171,92.329
Drill Drawing:
  text ".LEGEND" at 115.88,81.28 h1
  text "Drill Drawing." at 115.88,78.74 h1

## Dimensions
50.419,76.2 to 50.673,126.111 on Mechanical 1
50.8,76.2 to 110.8,76.2 on Mechanical 1